# Altium PCB Adafruit PowerBoost 1000C Rev B.PcbDoc
Units mil, origin at the board's own origin, x right, y up, seen from the top; angles counter-clockwise.
Board outline 1421.21 x 900 mil, 2 copper layers (Top, Bottom); 47 components, 23 nets, 142 pads, 41 vias.
Unrouted connection lines stored in the file: 3.
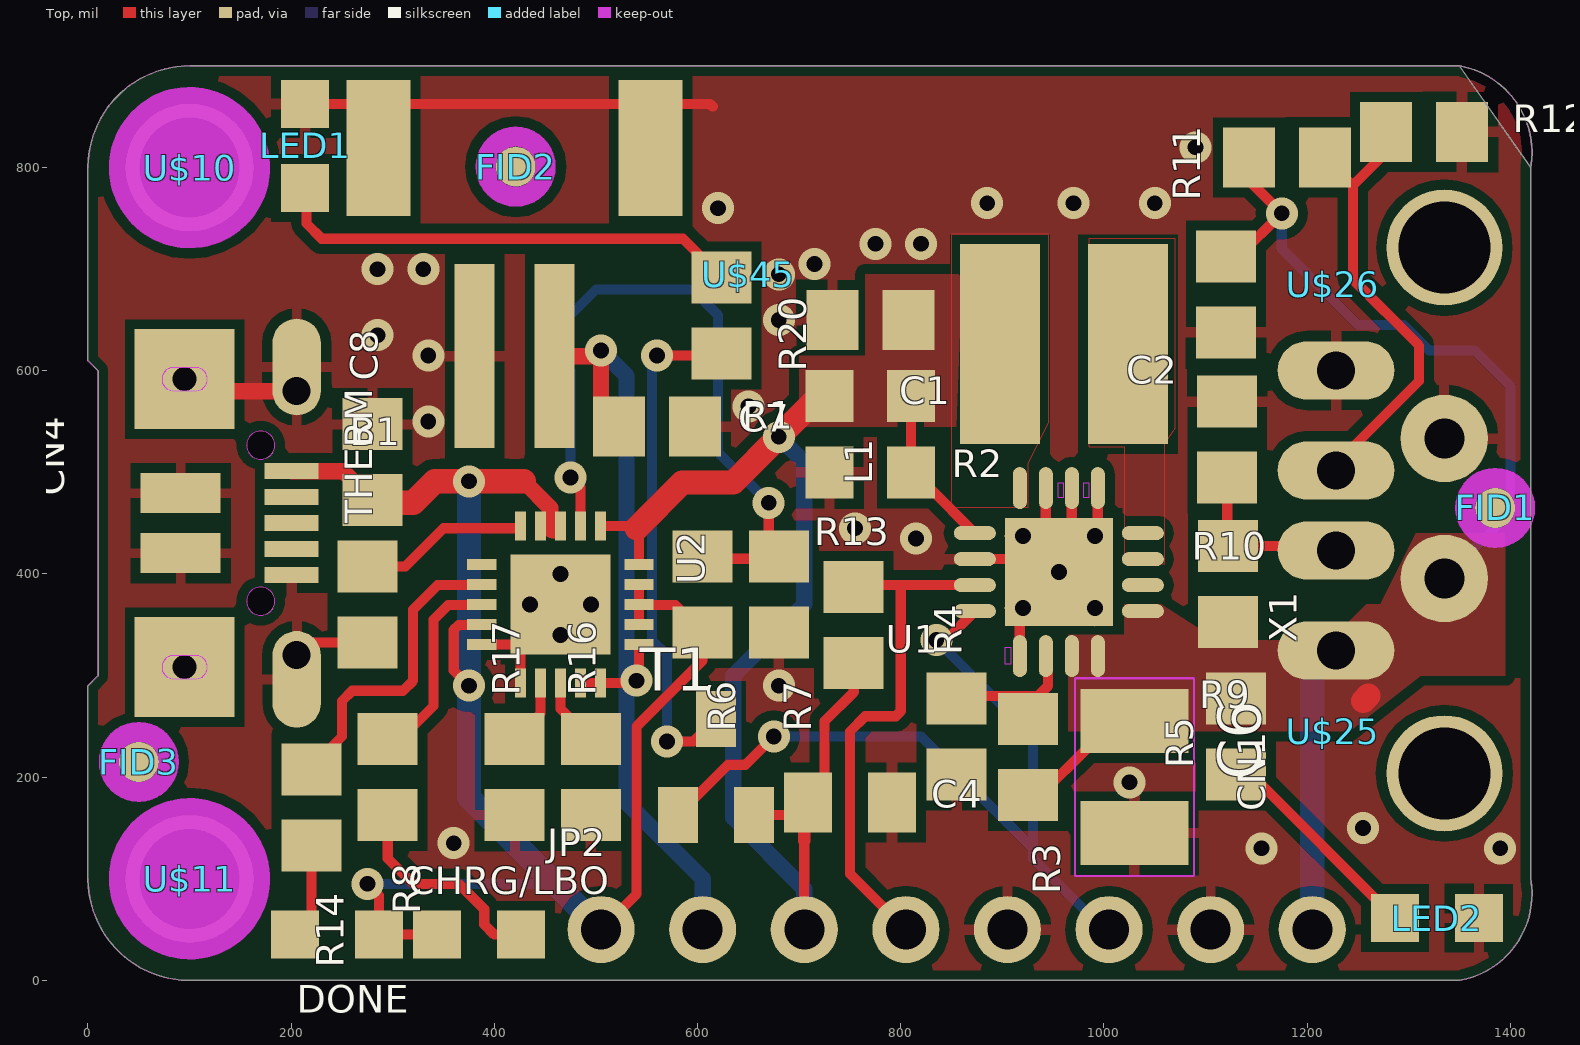
[diagram p0: Top view]
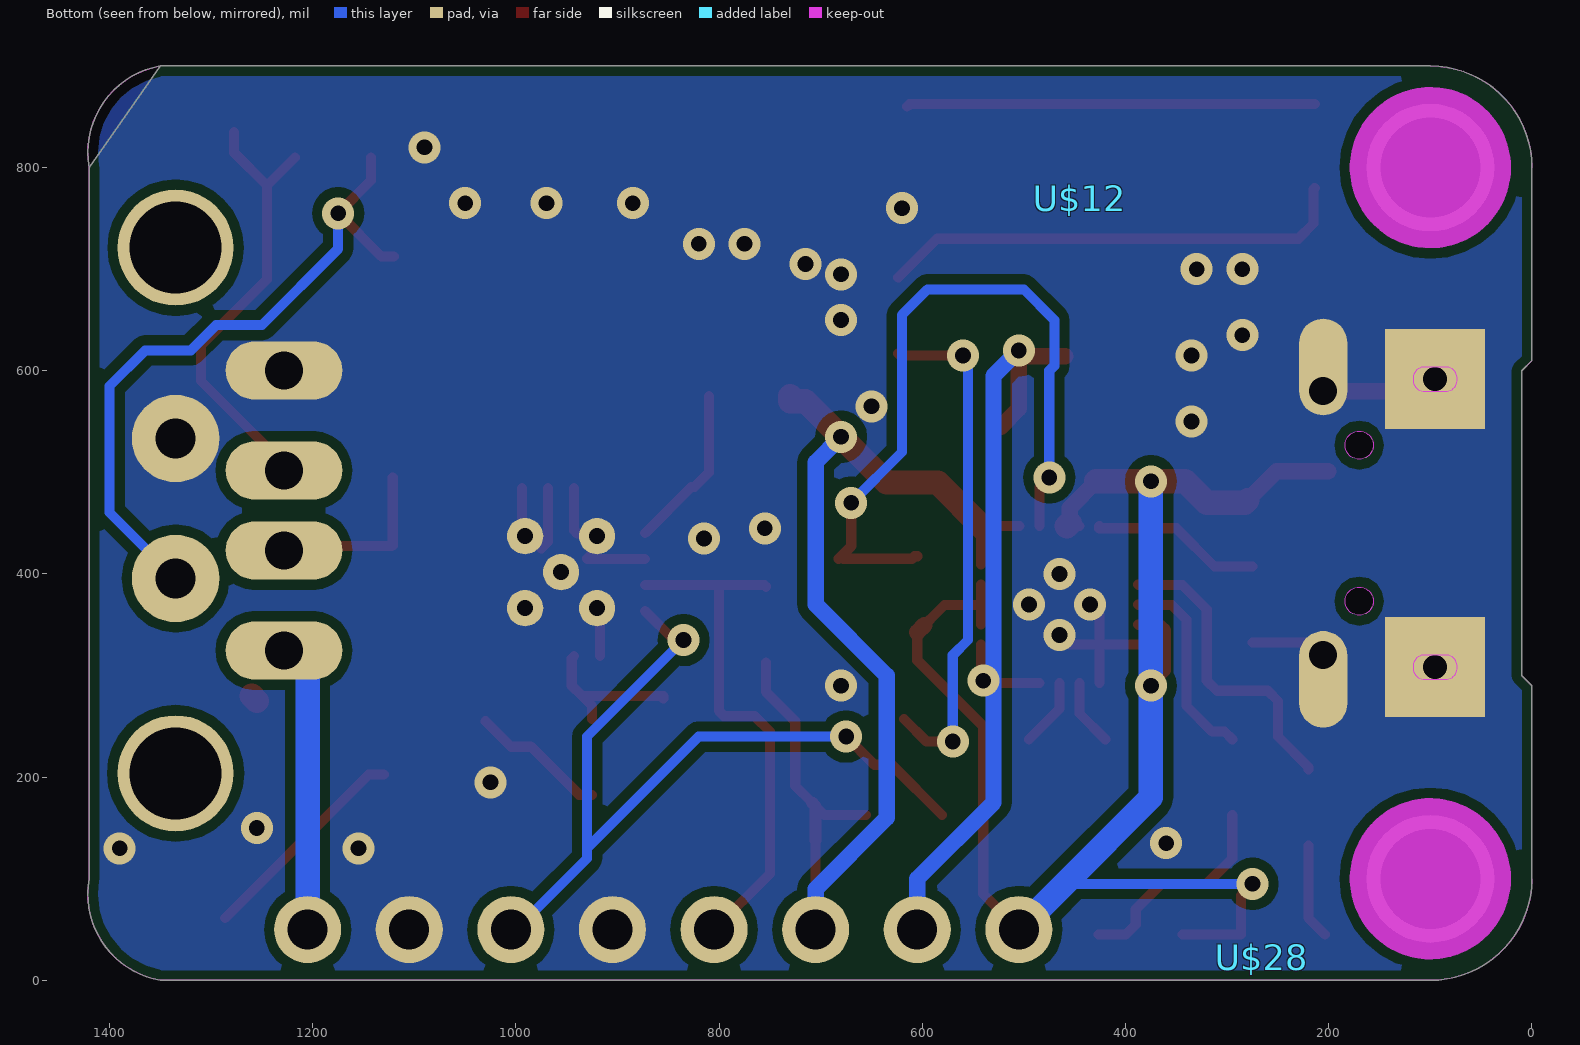
[diagram p1: Bottom view, seen from below]

## Layer stack, top to bottom
Top Solder: solder mask 0.4, Solder Resist, Dk 3.5
Top: signal copper 1.378
Dielectric 1: dielectric 12.6, FR-4, Dk 4.8
Bottom: signal copper 1.378
Bottom Solder: solder mask 0.4, Solder Resist, Dk 3.5

## Board outline
1420,800 ccw(c1335,815) 1350,900 100,900 ccw(c100,800) 0,800 0,610 10,600 10,300 0,290 0,100 ccw(c100,100) 100,0 1350,0 ccw(c1335,85) 1420,100 1420,800 ccw(c1335,815)
cut-out: 116.85,308.27 cw(c106.03,307.29) 107.01,296.46 83.39,296.46 cw(c84.37,307.29) 73.54,308.27 cw(c84.37,309.25) 83.39,320.08 107.01,320.08 cw(c106.03,309.25)
cut-out: 83.39,603.54 107.01,603.54 cw(c106.03,592.72) 116.85,591.73 cw(c106.03,590.75) 107.01,579.92 83.39,579.92 cw(c84.37,590.75) 73.54,591.73 cw(c84.37,592.71)
cut-out: 170,359.45 ccw(c170,373.23) 183.78,373.23 ccw(c170,373.23) 170,387.01 ccw(c170,373.23) 156.22,373.23 ccw(c170,373.23)
cut-out: 170,512.99 ccw(c170,526.77) 183.78,526.77 ccw(c170,526.77) 170,540.55 ccw(c170,526.77) 156.22,526.77 ccw(c170,526.77)

## Design rules (kind name [scope] priority, off if disabled: settings)
BoardOutlineClearance mdCopperDimension [All] p1: gap=10 ignorepadtopadclearanceinfootprint=FALSE except(0: Arc-SplitContinuation Track-SplitContinuation SMDPad-SplitContinuation THPad-SplitContinuation Via-SplitContinuation Fill-SplitContinuation Poly-SplitContinuation Region-SplitContinuation Text-SplitContinuation)
Clearance Clearance_for_PolygonClass_Isolate_10 [InPolygonClass('Isolate_10') vs IsArc Or IsTrack Or IsPad Or IsVia Or IsFill Or IsRegion Or IsText] p1: gap=10 ignorepadtopadclearanceinfootprint=FALSE
Clearance "Clearance (Same Net)" [All] p2: gap=8 ignorepadtopadclearanceinfootprint=FALSE
Clearance [All] p3: gap=8 ignorepadtopadclearanceinfootprint=FALSE
HoleSize [All] p1: absolutevalues=TRUE maxlimit=100000 minlimit=15.5 maxpercent=80.000 minpercent=20.000
HoleToHoleClearance mdDrill [All] p1: gap=8 allowstackedmicrovias=TRUE
MinimumSolderMaskSliver [All] p1 off: minsoldermaskwidth=10
PasteMaskExpansion Expansion_SMDPaste_OFF [InPadClass('SMDPaste_OFF')] p1: expansion=0
PasteMaskExpansion mlMinCreamFrame [All] p2: expansion=0
PolygonConnect PolygonConnect_For_PolygonThermal_ON_Width100000_Gap100000 [InPolygonClass('PolygonThermal_ON_Width100000_Gap100000') vs Not IsVia] p1: connectstyle=Relief reliefconductorwidth=10 reliefentries=4 polygonreliefangle="90 Angle" airgapwidth=10
PolygonConnect PolygonConnect_For_PolygonThermal_OFF [InPolygonClass('PolygonThermal_OFF')] p2: connectstyle=Direct reliefconductorwidth=10 reliefentries=4 polygonreliefangle="90 Angle" airgapwidth=10
PolygonConnect ThermalVias [IsVia] p3: connectstyle=Direct reliefconductorwidth=10 reliefentries=4 polygonreliefangle="90 Angle" airgapwidth=10
PolygonConnect [All] p4: connectstyle=Relief reliefconductorwidth=10 reliefentries=4 polygonreliefangle="90 Angle" airgapwidth=10
RoutingVias [All] p1: holewidth=15.5 width=31.5 viastyle="Through Hole" minholewidth=15.5 minwidth=31.5 maxholewidth=100 maxwidth=100
SolderMaskExpansion Expansion_SMDSolder_OFF [InPadClass('SMDSolder_OFF')] p1: expansion=0 istentingtop=FALSE
SolderMaskExpansion mlMinStopFrame [All] p2: expansion=2 istentingtop=FALSE
Width [All] p1: maxlimit=10000 minlimit=8 preferedwidth=8
26 further rules are at their usual default settings.

## Classes and differential pairs
polygon class PolygonThermal_ON_Width100000_Gap100000: Polygon_1_Net_GND
polygon class PolygonThermal_OFF: Polygon_1_Net_5.0V Polygon_1_Net_N$1 Polygon_1_Net_VBAT Polygon_2_Net_GND Polygon_2_Net_VBAT
polygon class Isolate_10: Polygon_1_Net_5.0V Polygon_1_Net_GND Polygon_1_Net_N$1 Polygon_1_Net_VBAT Polygon_2_Net_GND
pad class SMDSolder_OFF: CN4-D+ CN4-D- CN4-GND CN4-ID CN4-VBUS U2-P$1 U2-P$2 U2-P$3 U2-P$4 U2-P$5 U2-P$6 U2-P$7 U2-P$8 U2-P$9 U2-P$10 U2-P$11 U2-P$12 U2-P$13 U2-P$14 U2-P$15 U2-P$16 U2-P$17 U2-P$18 U2-P$19 U2-P$20
pad class SMDPaste_OFF: FID1-1 FID2-1 FID3-1 U1-THERMAL U2-P$21

## Components (designator, comment, footprint, x,y, rotation, side; value= is the part's Value field where it differs from the comment)
B1 "JST 2-PH" JSTPH2 420,760 r0 top
C1 "10uF" 0805-NO 770,650 r180 top
C2 "2.2uF" 0805-NO 1120,675 r270 top
C4 "0.1uF" 0805_10MGAP 750,175 r0 top
C6 "100uF" C1210 1030,200 r270 top
C7 "10uF" 0805-NO 560,545 r0 top
C8 "10uF" 0805-NO 280,510 r90 top
CHRG/LBO "ORANGE" CHIPLED_0805_NOOUTLINE 385,45 r270 top
CN1 "USBA_FEMALE" USB_HOST-PTH 1485,462.5 r90 top
CN4 "MicroUSB" 4UCONN_20329 170,450 r270 top
DONE "GREEN" CHIPLED_0805_NOOUTLINE 245,45 r90 top
FID1 "" FIDUCIAL_1MM 1385,465 r0 top
FID2 "" FIDUCIAL_1MM 420.94,800.91 r90 top
FID3 "" FIDUCIAL_1MM 50,215 r0 top
JP2 "" 1X08_ROUND 855,50 r0 top
L1 "" INDUCTOR_5X5MM_TDK_VLC5045 960.71,626.14 r0 top
LED1 "RED" CHIPLED_0805_NOOUTLINE 213.74,821.3 r0 top
LED2 "BLUE" CHIPLED_0805_NOOUTLINE 1327.68,61.26 r270 top
R1 "1.87M" _0805MP 770,575 r180 top
R2 "340K" _0805MP 770,500 r0 top
R3 "1.87M" 0805-NO 925,220 r270 top
R4 "200K" 0805-NO 855,240 r90 top
R5 "1K" 0805-NO 1130,240 r270 top
R6 "270K" 0805-NO 605,380 r270 top
R7 "100K" 0805-NO 680,380 r270 top
R8 "1K" 0805-NO 295,200 r270 top
R9 "43K" 0805-NO 1121.97,390.04 r270 top
R10 "49.9K" 0805-NO 1121.26,532.4 r90 top
R11 "75K 1%" 0805-NO 1180,810 r180 top
R12 "49.9K 1%" 0805-NO 1315,835 r0 top
R13 "200K" 0805-NO 753.7,349.96 r90 top
R14 "1K" 0805-NO 220,170 r270 top
R16 "1.0K" 0805-NO 495,200 r90 top
R17 "100K" 0805-NO 420,200 r90 top
R20 "1K" 0805-NO 623.74,654.45 r270 top
T1 "MMUN2133LT1G" SC59-BEC 618,210 r0 top
THERM "15K" 0805-NO 275,370 r90 top
U1 "TPS61090RSAR" PVQFN-16 955.55,401.81 r180 top
U2 "MCP73871" QFN20_4MM 465,370 r270 top
U$10 "" MOUNTINGHOLE_2.5_PLATED 100,800 r0 top
U$11 "" MOUNTINGHOLE_2.5_PLATED 100,100 r0 top
U$12 "" PCBFEAT-REV-040 445,770 r180 bottom
U$25 "" SYMBOL_PLUS 1225,245 r0 top
U$26 "" SYMBOL_MINUS 1225,685 r90 top
U$28 "" ADAFRUIT_5MM 265.83,22.68 r90 bottom
U$45 "" ADAFRUIT_3.5MM 650,695 r0 top
X1 "" TERMBLOCK_1X2-3.5MM 1335,462.5 r90 top

## Footprints (in the part's own frame and the unit in brackets; to place one, negate y for a bottom-side part, rotate by r counter-clockwise, add the part's x,y. Pads: shape width x height; smd on the part's side, far side on the other; paste and mask are expansions set on the pad)
1X08_ROUND [mil] "1X08_ROUND"
  round 66 hole 39.37: 1(-350,0) 2(-250,0) 3(-150,0) 4(-50,0) 5(50,0) 6(150,0) 7(250,0) 8(350,0)
4UCONN_20329 [mm] "4UCONN_20329"
  rect 1x2 smd: BASE@1(-0.75,-2) BASE@2(0.75,-2)
  rect 0.4x1.35 smd mask+0: D+(0,0.775) D-(-0.65,0.775) GND(1.3,0.775) ID(0.65,0.775) VBUS(-1.3,0.775)
  oval 2.416x1.208 hole 0.7 copper offset -0.604,0: SPRT@1(-3.3,0.9)
  oval 2.416x1.208 hole 0.7 copper offset 0.604,0: SPRT@2(3.3,0.9)
  rect 2.5x2.5 / inner round 2.31 / far side rect 2.5x2.5 hole 0.6: SPRT@3(-3.6,-1.9) SPRT@4(3.6,-1.9)
0805-NO [mil] "0805-NO"
  rect 51.18x59.06 smd: 1(-37.4,0) 2(37.4,0)
0805_10MGAP [mil] "0805_10MGAP"
  rect 47.24x59.06 smd: 1(-41.34,0) 2(41.34,0)
_0805MP [mil] "_0805MP"
  rect 47.24x51.18 smd: 1(-40,0) 2(40,0)
ADAFRUIT_3.5MM [mil] "ADAFRUIT_3.5MM"
ADAFRUIT_5MM [mil] "ADAFRUIT_5MM"
C1210 [mil] "C1210"
  rect 62.99x106.3 smd: 1(-55.12,0) 2(55.12,0)
  Top keep-out lines w2: 97.36,-58.39 97.36,58.39 -97.36,58.39 -97.36,-58.39 97.36,-58.39
CHIPLED_0805_NOOUTLINE [mil] "CHIPLED_0805_NOOUTLINE"
  rect 47.24x47.24 smd: A(0,-41.34) C(0,41.34)
FIDUCIAL_1MM [mm] "FIDUCIAL_1MM"
  rrect100% 1x1 smd paste+0: 1(0,0)
  Top keep-out lines w0.5: -0.75,0 ccw(c0,0) 0,-0.75 ; -0.75,0 cw(c0,0) 0,0.75 ; -0.75,0 ccw(c0,0) 0,-0.75 ; -0.75,0 cw(c0,0) 0,0.75 ; 0,-0.75 ccw(c0,0) 0.75,0 ; 0,-0.75 ccw(c0,0) 0.75,0 ; 0,0.75 cw(c0,0) 0.75,0 ; 0,0.75 cw(c0,0) 0.75,0
INDUCTOR_5X5MM_TDK_VLC5045 [mm] "INDUCTOR_5X5MM_TDK_VLC5045"
  rect 2x5 smd: P$1(-1.6,0) P$2(1.6,0)
JSTPH2 [mm] "JSTPH2"
  rect 1x4.6 smd: 1(-1,-3.7) 2(1,-3.7)
  rect 1.6x3.4 smd: NC1(-3.4,1.5) NC2(3.4,1.5)
MOUNTINGHOLE_2.5_PLATED [mil] "MOUNTINGHOLE_2.5_PLATED"
  round 125.98 hole 98.43: P$1(0,0)
  Top keep-out circle w80: c0,0 r39.37
  Top keep-out circle w80: c0,0 r39.37
  Bottom keep-out circle w80: c0,0 r39.37
  Bottom keep-out circle w80: c0,0 r39.37
PCBFEAT-REV-040 [mil] "PCBFEAT-REV-040"
PVQFN-16 [mm] "PVQFN-16"
  rrect100% 1.05x0.35 smd: 1(-2.1,0.975) 2(-2.1,0.325) 3(-2.1,-0.325) 4(-2.1,-0.975) 9(2.1,-0.975) 10(2.1,-0.325) 11(2.1,0.325) 12(2.1,0.975)
  rrect100% 0.35x1.05 smd: 5(-0.975,-2.1) 6(-0.325,-2.1) 7(0.325,-2.1) 8(0.975,-2.1) 13(0.975,2.1) 14(0.325,2.1) 15(-0.325,2.1) 16(-0.975,2.1)
  round 0.908 hole 0.4: P$18(0,0) P$19(-0.9,0.9) P$20(0.9,0.9) P$21(0.9,-0.9) P$22(-0.9,-0.9)
  rect 2.7x2.7 smd paste+0: THERMAL(0,0)
QFN20_4MM [mm] "QFN20_4MM"
  rect 0.73x0.28 smd mask+0: P$1(-1.965,1) P$2(-1.965,0.5) P$3(-1.965,0) P$4(-1.965,-0.5) P$5(-1.965,-1) P$11(1.965,-1) P$12(1.965,-0.5) P$13(1.965,0) P$14(1.965,0.5) P$15(1.965,1)
  rect 0.28x0.73 smd mask+0: P$6(-1,-1.965) P$7(-0.5,-1.965) P$8(0,-1.965) P$9(0.5,-1.965) P$10(1,-1.965) P$16(1,1.965) P$17(0.5,1.965) P$18(0,1.965) P$19(-0.5,1.965) P$20(-1,1.965)
  rect 2.5x2.5 smd paste+0: P$21(0,0)
SC59-BEC [mm] "SC59-BEC"
  rect 1x1.4 smd: B(-0.95,-1.2) C(0,1.2) E(0.95,-1.2)
SYMBOL_MINUS [mil] "SYMBOL_MINUS"
SYMBOL_PLUS [mil] "SYMBOL_PLUS"
TERMBLOCK_1X2-3.5MM [mil] "TERMBLOCK_1X2-3.5MM"
  round 86 hole 39.37: 1(70.87,0) 2(-66.93,0)
USB_HOST-PTH [mm] "USB_HOST-PTH"
  oval 1.458x2.916 hole 0.95: D+(1,6.52) D-(-1,6.52) GND(3.5,6.52) VBUS(-3.5,6.52)
  round 2.9 hole 2.3: S1(-6.57,3.81) S2(6.57,3.81)

## Part data
B1: library part JSTPH2, PackageName=JSTPH2
C1 C2 C7 C8 R3 R4 R5 R6 R7 R8 R9 R10 R11 R12 R13 R14 R16 R17 R20 THERM: library part 0805-NO, PackageName=0805-NO
C4: library part 0805_10MGAP, PackageName=0805_10MGAP
C6: library part C1210, PackageName=C1210
CHRG/LBO DONE LED1 LED2: library part CHIPLED_0805_NOOUTLINE, PackageName=CHIPLED_0805_NOOUTLINE
CN1: library part USB_HOST-PTH, PackageName=USB_HOST-PTH
CN4: library part 4UCONN_20329, PackageName=4UCONN_20329
FID1 FID2 FID3: library part FIDUCIAL_1MM, PackageName=FIDUCIAL_1MM
JP2: library part 1X08_ROUND, PackageName=1X08_ROUND
L1: library part INDUCTOR_5X5MM_TDK_VLC5045, PackageName=INDUCTOR_5X5MM_TDK_VLC5045
R1 R2: library part _0805MP, PackageName=_0805MP
T1: library part SC59-BEC, PackageName=SC59-BEC
U1: library part PVQFN-16, PackageName=PVQFN-16
U2: library part QFN20_4MM, PackageName=QFN20_4MM
U$10 U$11: library part MOUNTINGHOLE_2.5_PLATED, PackageName=MOUNTINGHOLE_2.5_PLATED
U$12: library part PCBFEAT-REV-040, PackageName=PCBFEAT-REV-040
U$25: library part SYMBOL_PLUS, PackageName=SYMBOL_PLUS
U$26: library part SYMBOL_MINUS, PackageName=SYMBOL_MINUS
U$28: library part ADAFRUIT_5MM, PackageName=ADAFRUIT_5MM
U$45: library part ADAFRUIT_3.5MM, PackageName=ADAFRUIT_3.5MM
X1: library part TERMBLOCK_1X2-3.5MM, PackageName=TERMBLOCK_1X2-3.5MM

## Free pads (board coordinates)
  round 27.56 hole 27.56 unplated: MH1(170,526.77) MH2(170,373.23)

## Via types
v1: diameter 31.5/31.5 (per signal layer), hole 15.5, Top to Bottom, 41 vias

## Nets (pads, with @x,y where several pads share a name; then routed paths per layer and width w, separated by ;. In a path a pad name is that pad's centre, name@x,y a point inside that pad or via, vN(x,y) a via of type N, cw(c..) or ccw(c..) an arc to the next point about the centre after c; other vN are vias at no path point)
5.0V: C2.1 C6.1 CN1.VBUS JP2.8 R3.2 R5.1 R9.2 R11.2 U1.1 U1.15 U1.16 X1.2 | length 1148.7
  Top w10: R3.2 937.6,182.6 985,230 1004.88,230 C6.1 ; C2.1 1132.4,712.4 v1(1175,755) 1142.6,787.4 R11.2 ; CN1.VBUS 1259.7,324.7 1265,330 CN1.VBUS@1275,330
  Top w24: 1255,275 1260,280
  Bottom w10: v1(1175,755) 1175,720 1250,645 1295,645 1320,620 1365,620 1400,585 1400,460.57 X1.2
  Bottom w24: JP2.8 1205,301.4 CN1.VBUS
D+: CN1.D+ R11.1 R12.1 | length 446.4
  Top w10: R11.1 1245,782.4 ; CN1.D+ 1228.31,508.31 1310,590 1310,625 1245,690 1245,782.4 ; R12.1 1277.6,815 1245,782.4
D-: CN1.D- R9.1 R10.1 | length 176
  Top w10: R10.1 1121.26,428.15 R9.1 1224,427.44 CN1.D-
ENABLE: JP2.4 R13.2 U1.11 | length 519.9
  Top w10: R13.2 755.35,389.02 800,389.02 ; JP2.4 750,105 750,245 765,260 795,260 800,265 800,389.02 ; U1.11 800,389.02
GND: B1.1 C1.2 C2.2 C4.2 C6.2 C7.2 C8.2 CN1.GND CN4.BASE@1 CN4.BASE@2 CN4.GND CN4.SPRT@1 CN4.SPRT@2 CN4.SPRT@3 CN4.SPRT@4 JP2.5 JP2.7 LED1.C LED2.C R2.1 R4.1 R7.2 R10.2 R12.2 R16.1 R17.1 THERM.1 U1.5 U1.6 U1.7 U1.10 U1.13 U1.P$18 U1.P$19 U1.P$20 U1.P$21 U1.P$22 U1.THERMAL U2.P$10 U2.P$11 U2.P$21 X1.1 | length 1081.7
  Top w10: 210,325 205.43,325 205.43,320.08 217.95,332.6 THERM.1 ; LED1.C 612.36,862.64 615,860 ; U2.P$10 455.63,330.63 v1(465,340) ; U2.P$11 425.63,360.63 v1(435,370) ; U1.10 929.61,414.61 930,415 920.12,424.88 U1.P$21 922.87,440 940,440 942.76,442.76 U1.7 ; U1.13 917.17,357.17 925,365 921.5,365 U1.P$20 ; U1.6 968.35,431.65 U1.THERMAL@975,425 ; U1.P$22 993.94,440.2 U1.5
  Top w16: 112.01,579.92 205.43,579.92 ; 193.27,308.27 210,325
  other v1: 1155,130 1390,130 360,135 1255,150 1025,195 680,290 495,370 465,400 815,435 755,445 335,550 650,565 335,615 285,635 680,650 680,695 285,700 330,700 715,705 775,725 820,725 620,760 885,765 970,765 1050,765 1090,820
LBO: JP2.6 T1.B U1.12 | length 835
  Top w10: T1.B 630,212.16 647.16,212.16 v1(675,240) ; v1(835,335) 844.45,335 U1.12
  Bottom w10: v1(675,240) 820,240 930,130 ; v1(835,335) 930,240 930,130 ; JP2.6 1000,50 930,120 930,130
N$1: L1.P$2 U1.3 U1.4
N$2: LED1.A R20.1 | length 466.2
  Top w10: LED1.A 215,778.7 215,745 230,730 585.59,730 R20.1
N$3: R1.1 R2.2 U1.9 | length 162.6
  Top w10: R1.1 R2.2 824.33,485.67 827.4,485.67 U1.9
N$4: LED2.A R5.2 | length 214.9
  Top w10: R5.2 1145,202.6 LED2.A
N$5: R3.1 R4.2 U1.14 | length 153.5
  Top w10: R4.2 855,280 R3.1@935,280 ; R3.1 925,270 R3.1@935,280 ; U1.14 945,316.89 945,290 R3.1@935,280
N$6: R20.2 T1.C | length 510.1
  Top w10: v1(560,615) 621.69,615 R20.2 ; v1(570,235) 595.76,235 T1.C
  Bottom w10: v1(560,615) 555,610 555,335 570,320 v1(570,235)
N$7: R6.1 R7.1 U2.P$2 | length 724.3
  Top w10: v1(475,495) 484.69,485.32 U2.P$2 ; R6.1 607.6,417.4 610,415 677.6,415 R7.1 ; v1(670,470) 670,427.4 R7.1 ; R7.1@682.4,415 R7.1
  Bottom w10: v1(475,495) 475,600 470,605 470,650 500,680 595,680 620,655 620,520 v1(670,470)
N$8: DONE.C R14.2 | length 94.4
  Top w10: DONE.C 220,61.34 R14.2
N$9: R14.1 U2.P$7 | length 306.2
  Top w10: R14.1 220,210 250,240 250,275 260,285 310,285 320,295 320,365 344.18,389.18 387.14,389.18 U2.P$7
N$10: THERM.2 U2.P$5 | length 168.9
  Top w10: THERM.2 312.4,407.4 350,445 425.84,445 425.84,447.15 U2.P$5
N$11: R8.1 U2.P$8 | length 197.4
  Top w10: R8.1 302.6,245 315,245 340,270 340,355 354.5,369.5 387.14,369.5 U2.P$8
N$12: CHRG/LBO.C R8.2 | length 213.8
  Top w10: R8.2 295,120 320,95 365,95 390,70 390,55 400,45 CHRG/LBO.C
N$13: R17.2 U2.P$12 | length 65.7
  Top w10: R17.2 445.32,262.72 U2.P$12
N$16: R16.2 U2.P$13 | length 67.7
  Top w10: U2.P$13 465,267.4 R16.2
VBAT: C1.1 C4.1 JP2.3 L1.P$1 R1.2 R13.1 T1.E U1.8 U2.P$1 U2.P$20 | length 1216.1
  Top w10: U2.P$1 537.64,447.36 540,445 544.43,440.57 542.36,438.5 U2.P$20 ; T1.E 696.42,162.76 C4.1 725,191.34 725,255 753.7,283.7 R13.1 ; JP2.3 705,137.4
  Top w12: 705,137.4 705,171.34 C4.1
  Top w24: 540,445 585,490 635,490 v1(680,535) 715,570 730,570 R1.2
  Bottom w16: v1(680,535) 705,510 705,370 635,300 635,160 705,90 JP2.3
VBUS: C8.1 CHRG/LBO.A CN4.VBUS DONE.A JP2.1 R6.2 U2.P$3 U2.P$4 U2.P$9 U2.P$17 U2.P$18 U2.P$19 | length 1674
  Top w10: v1(275,95) 286.34,83.66 DONE.A CHRG/LBO.A ; v1(375,290) 360,305 360,345 364.81,349.81 387.14,349.81 U2.P$9 ; U2.P$4 U2.P$3 458.46,447.36 457.96,446.86 ; JP2.1 540,85 540,250 605,315 R6.2 578.1,369.5 542.86,369.5 U2.P$18 ; U2.P$17 U2.P$18 ; U2.P$19 U2.P$18
  Top w16: CN4.VBUS 251.42,501.18 C8.1 ; 428.82,491.18 455,465 455,449.82 ; R6.2@597.79,349.81 R6.2
  Top w24: C8.1 282.6,470 320,470 341.18,491.18 v1(375,491.18) 428.82,491.18 ; 455,449.82 457.96,446.86
  Bottom w10: v1(275,95) 460,95
  Bottom w24: v1(375,491.18) v1(375,290) 375,180 460,95 JP2.1
VLIPO: B1.2 C7.1 JP2.2 U2.P$14 U2.P$15 U2.P$16 | length 844.6
  Top w10: U2.P$14 U2.P$15 537.64,292.64 v1(540,295) 542.36,297.36 U2.P$16
  Top w16: B1.2 499.33,614.33 v1(505,620) 505,562.6 C7.1
  Bottom w16: v1(505,620) 530,595 v1@530,295 ; v1(540,295) v1@530,295 ; JP2.2 605,100 530,175 v1@530,295
pads on no net: B1.NC1 B1.NC2 CN1.S1 CN1.S2 CN4.D+ CN4.D- CN4.ID FID1.1 FID2.1 FID3.1 U1.2 U2.P$6 U$10.P$1 U$11.P$1

## Polygon pours and split planes (outlines as drawn)
VBAT on Top "Polygon_2_Net_VBAT" (solid, remove dead copper, pour order 0): 765,695 765,615 700,615 700,545 854.82,545 860.18,695
VBAT on Top "Polygon_1_Net_VBAT" (solid, remove dead copper, pour order 2): 925,465 850,465 850,735 945,735 945,548.82 925,508.82
5.0V on Top "Polygon_1_Net_5.0V" (solid, remove dead copper, pour order 3): 965,340 965,245 1241.73,245 1311.73,300 1395,300 1395,440 1306.91,440 1271.91,370 1257.93,370 1222.93,335 1111.46,335 1056.46,370 1020,370 1020,340
N$1 on Top "Polygon_1_Net_N$1" (solid, remove dead copper, pour order 1): 1020,410 1060,410 1060,528.49 1070,543.49 1070,730 985,730 985,525 1020,525
GND on Top "Polygon_1_Net_GND" (solid, remove dead copper, pour order 5): -5,-10.02 -5,894.98 1425,900.02 1425,-4.98
GND on Bottom "Polygon_2_Net_GND" (solid, remove dead copper, pour order 4): -5,899.96 1425,910.04 1425,5.04 -5,-5.04

## Keep-outs
Top:
  region: 955,475 955,490 960,490 960,475
  region: 980,475 980,490 985,490 985,475
  region: 903,311 903,328 908,328 908,311
Keep-Out Layer:
  the board outline again, w0

## Silkscreen, mask and mechanical layers (free items; w line width, h text height)
Dimension:
  the board outline again, w0
tPlace:
  text "PowerBoost 1000C" at 605,850 h34
  text "adafruit" at 825,785 h34
  text "LOW" at 173.92,698.7 h29.75
  text "-" at 310,630 h42.5
  text "+" at 495,630 h42.5
  text "PWR" at 1287.5,98.55 h34
  text "G" at 1095,95 h34
  text "5V" at 1170,95 h34
  text "USB" at 435,90 h34
  text "Bat" at 560,90 h34
  text "Vs" at 675,90 h34
  text "EN" at 775,90 h34
  text "GND" at 865,90 h34
  text "chrg" at 260,80 h34
bPlace:
  text "PowerBoost 1000 Charger" at 1220.99,818.66 h42.5
  text "TPS61090 DC Boost" at 1228.53,738.66 h42.5
  text "5Vout: ~5.2V @ 1A+ output" at 1234.31,658.66 h42.5
  text "3.2V Low Batt Indicator" at 1156.83,568.66 h42.5
  text "LiPoly: 3.7V/4.2V Li only!" at 1156.39,478.66 h42.5
  text "Vsh:  larger of USB/LiPo" at 1128.69,383.66 h42.5
  text "USB: 1A Charge Rate" at 1165,300 h42.5
  text "iOS 1A Charge Resistors" at 1132.96,223.93 h34
  text "EN" at 785,95 h34 r270
  text "5Vo" at 1180,95 h34 r270
  text "USB" at 480,90 h34 r270
  text "LiPo" at 585,90 h34 r270
  text "Vsh" at 690,90 h34 r270
  text "GND" at 885,90 h34 r270
  text "LBO" at 985,90 h34 r270
  text "GND" at 1085,90 h34 r270

## Dimensions
0,215 to 855,50 on tFinish
0,780 to 420,760 on tFinish
100,100 to 100,795 on tFinish
195,0 to 170,450 on tFinish
290,0 to 250,900 on tFinish
0,640 to 1425,470 on tFinish

## Text inside footprints (layer, text, board x,y; h text height)
CHRG/LBO: tDocu "C" at 432.24,48.94 h8.5 r270; tDocu "A" at 329.88,48.94 h8.5 r270
CN4: tDocu "PCB EDGE" at 12.52,450 h13.6 r270
DONE: tDocu "C" at 197.76,41.06 h8.5 r90; tDocu "A" at 300.12,41.06 h8.5 r90
LED1: tDocu "C" at 209.8,868.54 h8.5; tDocu "A" at 209.8,766.18 h8.5
LED2: tDocu "C" at 1374.92,65.2 h8.5 r270; tDocu "A" at 1272.56,65.2 h8.5 r270
U$12: tPlace ">REV" at 459,750 h34